# Altium PCB smart-water-sensor.PcbDoc (part 2 of 5)
Units mm, origin at the board's own origin, x right, y up, seen from the top; angles counter-clockwise.
Board outline 124.33 x 108.9 mm, 4 copper layers (Top Layer, Layer 1, Layer 2, Bottom Layer), stack 0.603 mm thick; 150 components, 74 nets, 469 pads, 463 vias.
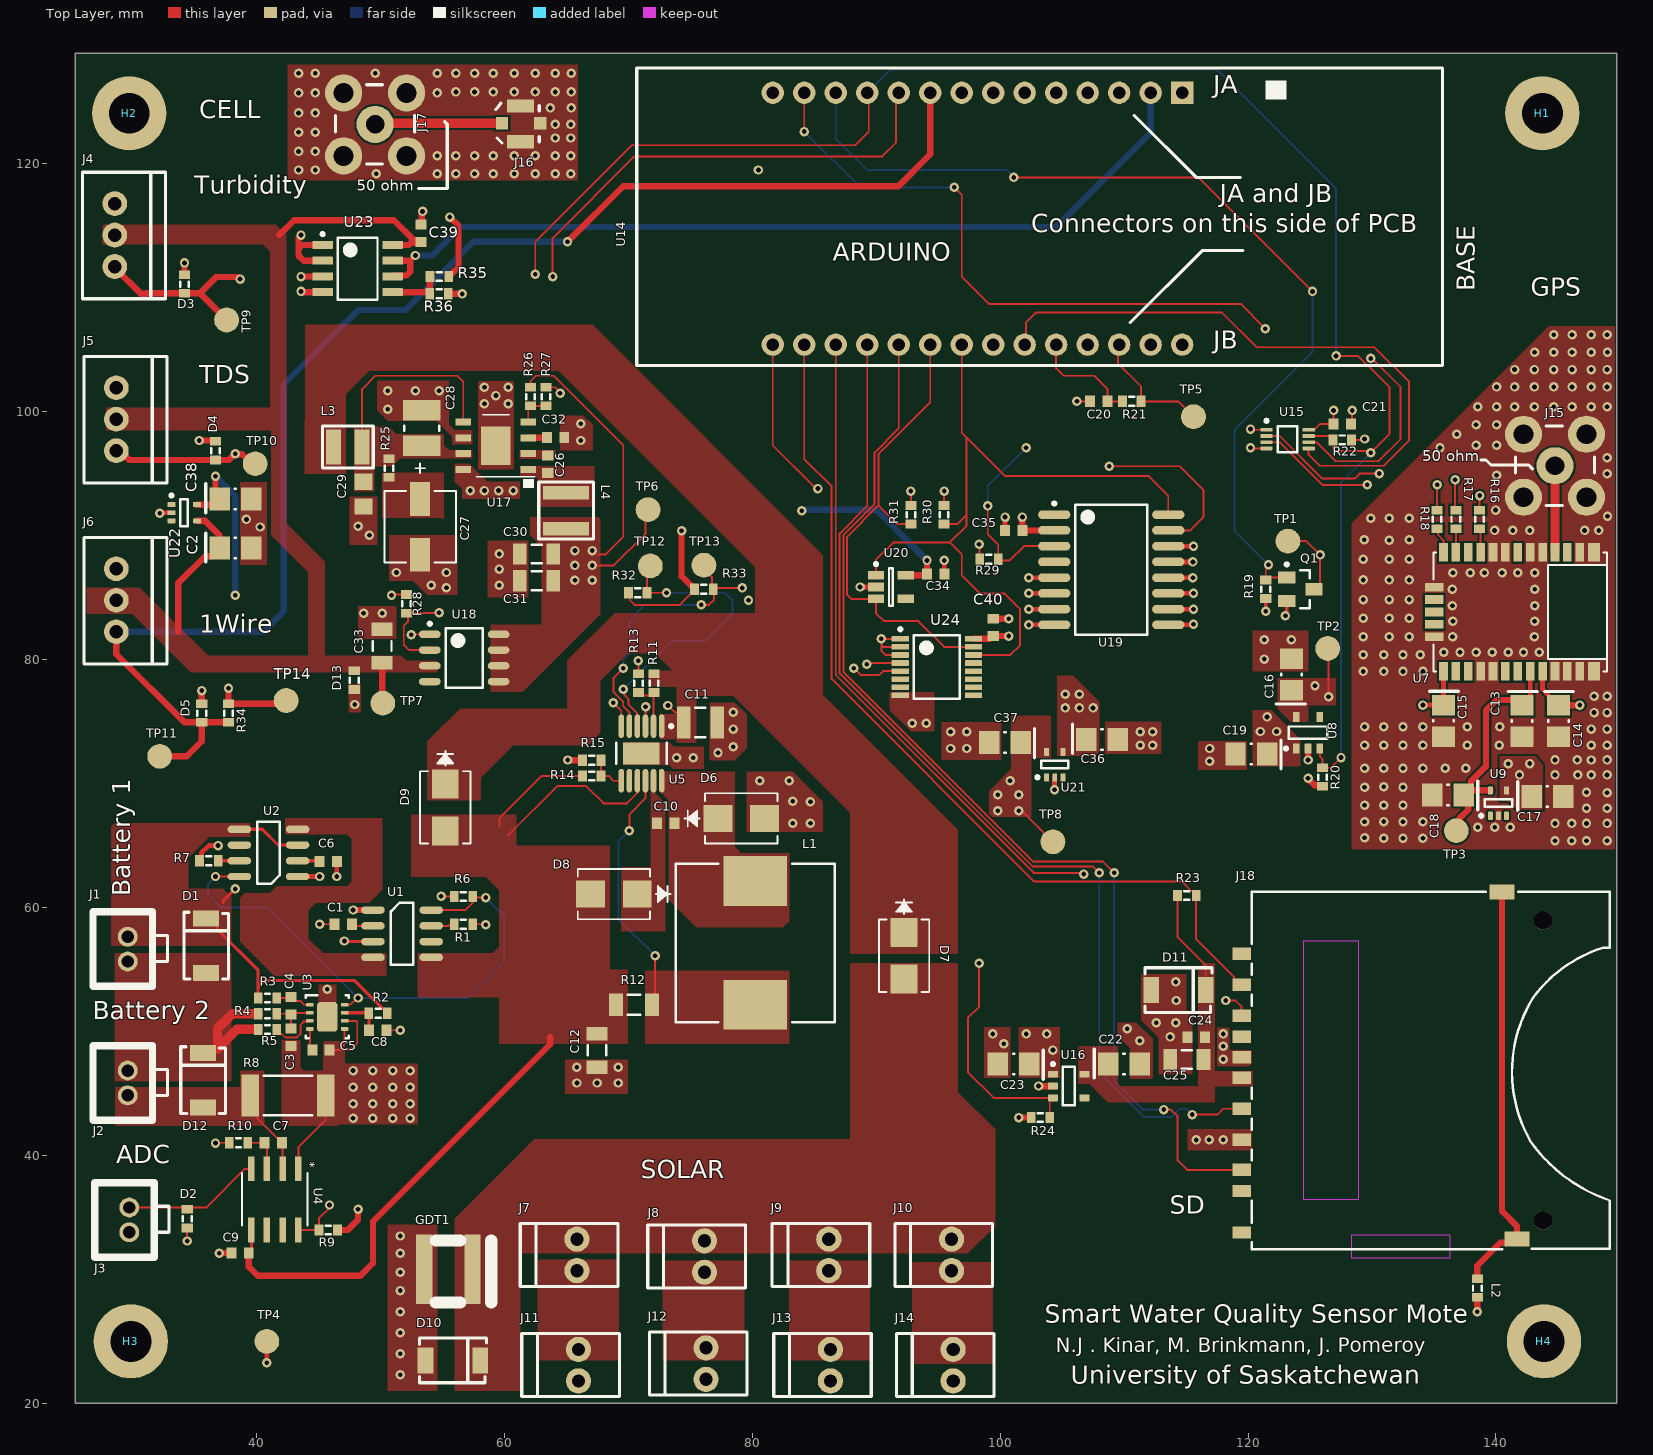
[diagram p0: Top Layer view]

## Part data (continued)
C27: library part 25SVPF27MX, "No Description Available", Capacitance=27uF, Case/Package=Radial, ESR (Equivalent Series Resistance)=40mR, Leakage Current=135uA, Manufacturer=Panasonic, Max Operating Temperature=105°C, Min Operating Temperature=-55°C, Package Quantity=1500, Ripple Current=2.45A, Supplier Part Number 1=P16511CT-ND, Tolerance=20%, Voltage=25V, Built_By=EMA_UL_Team, ComponentLink1Description=https://datasheet.ciiva.com/24094/svpf-os-262415-24094277.pdf?src-supplier=Mouser, ComponentLink1URL=https://datasheet.ciiva.com/24094/svpf-os-262415-24094277.pdf?src-supplier=Mouser, ComponentLink2Description=https://datasheet.ciiva.com/49031/70324301-49031162.pdf?src-supplier=Allied+Electronics, ComponentLink2URL=https://datasheet.ciiva.com/49031/70324301-49031162.pdf?src-supplier=Allied+Electronics, ComponentLink3Description=https://datasheet.ciiva.com/25746/1734360-25746540.pdf?src-supplier=Farnell, ComponentLink3URL=https://datasheet.ciiva.com/25746/1734360-25746540.pdf?src-supplier=Farnell, ComponentLink4Description=https://datasheet.ciiva.com/22746/1734360-22746216.pdf?src-supplier=Element14, ComponentLink4URL=https://datasheet.ciiva.com/22746/1734360-22746216.pdf?src-supplier=Element14, Copyright="Copyright (C) 2018 Accelerated Designs. All rights reserved", Diameter=5mm, Dissipation Factor=12%, Height=5.9mm, Height - Seated (Max)=0.236inch, Length=5.9mm, Life (Hours)=5000Hour, Manufacturer_Part_Number=25SVPF27MX, Manufacturer Part Number=25SVPF27MX, Mount="Surface Mount", Number of Pins=6, Packaging="Tape and Reel", Polarity=Polar, Pricing 1="1 = 1.02000, 10 = 0.80900, 100 = 0.60650, 500 = 0.45826 (USD)", REACH SVHC="No SVHC", RefDes=RefDes, Ripple Current (AC)=2.45A, RoHS=Yes, Stock 1=3478, Supplier 1=Digi-Key, Termination=SMD/SMT, Type=DEV, Vendor=Panasonic, Voltage Rating=25V, Voltage Rating (DC)=25V
C29: "Capacitor (Semiconductor SIM Model)", Capacitance=4.7uF, Case/Package=0805, Case Code (Metric)=2012, Dielectric=X5R, Dielectric Material=Ceramic, Manufacturer=TDK, Manufacturer Part Number=C2012X5R1H475K125AB, Max Operating Temperature=85°C, Min Operating Temperature=-55°C, Package Quantity=1, Supplier Part Number 1=445-5980-1-ND, Tolerance=10%, Voltage=50V, Case Code (Imperial)=0805, ComponentLink1Description=https://datasheet.ciiva.com/24216/c2012x5r1h475k125ab-265006-24216434.pdf?src-supplier=Mouser, ComponentLink1URL=https://datasheet.ciiva.com/24216/c2012x5r1h475k125ab-265006-24216434.pdf?src-supplier=Mouser, ComponentLink2Description=https://datasheet.ciiva.com/28673/mlcc-commercial-general-en-28673541.pdf?src-supplier=Element14, ComponentLink2URL=https://datasheet.ciiva.com/28673/mlcc-commercial-general-en-28673541.pdf?src-supplier=Element14, ComponentLink3Description=https://datasheet.ciiva.com/17487/e412-c-17487414.pdf?src-supplier=Avnet+Europe, ComponentLink3URL=https://datasheet.ciiva.com/17487/e412-c-17487414.pdf?src-supplier=Avnet+Europe, ComponentLink4Description=https://datasheet.ciiva.com/22725/1913358-22725564.pdf?src-supplier=Element14, ComponentLink4URL=https://datasheet.ciiva.com/22725/1913358-22725564.pdf?src-supplier=Element14, ComponentLink5Description=https://datasheet.ciiva.com/6276/tdkmlcccaprange-6276526.pdf?src-supplier=Digi-Key, ComponentLink5URL=https://datasheet.ciiva.com/6276/tdkmlcccaprange-6276526.pdf?src-supplier=Digi-Key, ComponentLink6Description=https://datasheet.ciiva.com/48671/e412-c-48671374.pdf?src-supplier=Avnet, ComponentLink6URL=https://datasheet.ciiva.com/48671/e412-c-48671374.pdf?src-supplier=Avnet, Composition=Ceramic, Depth=1.25mm, Height=1.25mm, LatestRevisionDate=29-May-2009, LatestRevisionNote="IPC-7351 Footprint Added.", Lead Free="Lead Free", Length=2mm, Mount="Surface Mount", PackageDescription="Chip Capacitor", PackageReference=C1206, Packaging="Tape and Reel", Pricing 1="1 = 0.80000, 10 = 0.56600, 100 = 0.37260, 500 = 0.27600, 1000 = 0.23460 (USD)", Published=8-Jun-2000, Publisher="Altium Limited", Radiation Hardening=No, REACH SVHC="No SVHC", RoHS=Yes, Stock 1=412452, Supplier 1=Digi-Key, Termination=SMD/SMT, Thickness=0.057inch, Voltage Rating=50V, Voltage Rating (DC)=50V, Weight=0.000194oz, Width=0.049inch
C30 C31 C33: "Capacitor (Semiconductor SIM Model)", Capacitance=47uF, Case/Package=1206, Case Code (Metric)=3216, Dielectric=X5R, Manufacturer=Murata, Manufacturer Part Number=GRM31CR61A476KE15L, Max Operating Temperature=85°C, Min Operating Temperature=-55°C, Package Quantity=2000, Supplier Part Number 1=490-9673-1-ND, Tolerance=10%, Voltage=10V, Case Code (Imperial)=1206, ComponentLink1Description=https://datasheet.ciiva.com/29536/grm31cr61a476ke15-01-29536840.pdf?src-supplier=Digi-Key, ComponentLink1URL=https://datasheet.ciiva.com/29536/grm31cr61a476ke15-01-29536840.pdf?src-supplier=Digi-Key, ComponentLink2Description=https://datasheet.ciiva.com/13337/product-13337807.pdf?src-supplier=Mouser, ComponentLink2URL=https://datasheet.ciiva.com/13337/product-13337807.pdf?src-supplier=Mouser, ComponentLink3Description=https://datasheet.ciiva.com/46445/1769893-46445005.pdf?src-supplier=Element14, ComponentLink3URL=https://datasheet.ciiva.com/46445/1769893-46445005.pdf?src-supplier=Element14, ComponentLink4Description=https://datasheet.ciiva.com/41860/partnumbering-e-01-41860758.pdf?src-supplier=Digi-Key, ComponentLink4URL=https://datasheet.ciiva.com/41860/partnumbering-e-01-41860758.pdf?src-supplier=Digi-Key, ComponentLink5Description=https://datasheet.ciiva.com/46445/1769893-46445004.pdf?src-supplier=Element14, ComponentLink5URL=https://datasheet.ciiva.com/46445/1769893-46445004.pdf?src-supplier=Element14, Depth=1.6mm, Height=1.6mm, LatestRevisionDate=29-May-2009, LatestRevisionNote="IPC-7351 Footprint Added.", Lead Free="Lead Free", Length=3.2mm, Material=Ceramic, Mount="Surface Mount", PackageDescription="Chip Capacitor", PackageReference=C1206, Packaging="Tape and Reel", Pricing 1="1 = 0.84000, 10 = 0.63700, 100 = 0.45540, 500 = 0.35254, 1000 = 0.30357 (USD)", Published=8-Jun-2000, Publisher="Altium Limited", REACH SVHC="No SVHC", RoHS=Yes, Stock 1=199340, Supplier 1=Digi-Key, Termination=SMD/SMT, Thickness=0.071inch, Voltage Rating=10V, Voltage Rating (DC)=10V, Width=1.6mm
C32: "Capacitor (Semiconductor SIM Model)", Capacitance=2.2uF, Case/Package=0603, Dielectric=X5R, Dielectric Material=Ceramic, Manufacturer=KEMET, Manufacturer Part Number=C0603C225K8PACTU, Max Operating Temperature=85°C, Min Operating Temperature=-55°C, Supplier Part Number 1=399-4911-1-ND, Tolerance=10%, Voltage=10V, ComponentLink1Description=https://datasheet.ciiva.com/11786/0900766b8116eb59-11786922.pdf?src-supplier=RSComponents, ComponentLink1URL=https://datasheet.ciiva.com/11786/0900766b8116eb59-11786922.pdf?src-supplier=RSComponents, ComponentLink2Description=https://datasheet.ciiva.com/18192/getdatasheetpartid-104076-18192933.pdf?src-supplier=Verical, ComponentLink2URL=https://datasheet.ciiva.com/18192/getdatasheetpartid-104076-18192933.pdf?src-supplier=Verical, ComponentLink3Description=https://datasheet.ciiva.com/7824/40889-7824025.pdf?src-supplier=Element14, ComponentLink3URL=https://datasheet.ciiva.com/7824/40889-7824025.pdf?src-supplier=Element14, ComponentLink4Description=https://datasheet.ciiva.com/26847/getdatasheetpartid-316295-26847626.pdf?src-supplier=Verical, ComponentLink4URL=https://datasheet.ciiva.com/26847/getdatasheetpartid-316295-26847626.pdf?src-supplier=Verical, Depth=0.8mm, Height=0.8mm, LatestRevisionDate=29-May-2009, LatestRevisionNote="IPC-7351 Footprint Added.", Lead Free="Lead Free", Length=1.6mm, Mount="Surface Mount", Number of Pins=2, PackageDescription="Chip Capacitor", PackageReference=C1206, Packaging="Tape and Reel", Pricing 1="1 = 0.24000, 10 = 0.16200, 100 = 0.08220, 500 = 0.05622, 1000 = 0.04973 (USD)", Published=8-Jun-2000, Publisher="Altium Limited", Radiation Hardening=No, RoHS=Yes, Stock 1=110745, Supplier 1=Digi-Key, Termination=SMD/SMT, Voltage Rating (DC)=10V
D1 D12: "Default Diode", Breakdown Voltage=100V, Case/Package=SMB, Clamping Voltage=146V, Leakage Current=5uA, Manufacturer=Bourns, Manufacturer Part Number=SMBJ9.0A, Max Operating Temperature=150°C, Max Power Dissipation=600W, Max Reverse Leakage Current=10uA, Max Surge Current=100A, Min Operating Temperature=-55°C, Operating Supply Voltage=3.5V, Package Quantity=3000, Peak Pulse Current=4.1A, Power Line Protection=No, Reverse Standoff Voltage=90V, Supplier Part Number 1=SMBJ9.0ABCT-ND, Test Current=1mA, ComponentLink1Description=http://www.bourns.com/data/global/pdfs/SMBJ.pdf, ComponentLink1URL=http://www.bourns.com/data/global/pdfs/SMBJ.pdf, ComponentLink2Description=https://datasheet.ciiva.com/25624/0900766b810f4eeb-25624683.pdf?src-supplier=RSComponents, ComponentLink2URL=https://datasheet.ciiva.com/25624/0900766b810f4eeb-25624683.pdf?src-supplier=RSComponents, ComponentLink3Description=https://datasheet.ciiva.com/15143/getdatasheetpartid-158332-15143823.pdf?src-supplier=Verical, ComponentLink3URL=https://datasheet.ciiva.com/15143/getdatasheetpartid-158332-15143823.pdf?src-supplier=Verical, ComponentLink4Description=https://datasheet.ciiva.com/331/littelfuse-tvs-diode-smbj-datasheet-pdf-331232.pdf?src-supplier=Digi-Key, ComponentLink4URL=https://datasheet.ciiva.com/331/littelfuse-tvs-diode-smbj-datasheet-pdf-331232.pdf?src-supplier=Digi-Key, ComponentLink5Description=https://datasheet.ciiva.com/8062/littelfuse-tvs-diode-smbj-8062311.pdf?src-supplier=Element14, ComponentLink5URL=https://datasheet.ciiva.com/8062/littelfuse-tvs-diode-smbj-8062311.pdf?src-supplier=Element14, ComponentLink6Description=https://datasheet.ciiva.com/331/littelfuse-tvs-diode-smbj-datasheet-pdf-331230.pdf?src-supplier=Digi-Key, ComponentLink6URL=https://datasheet.ciiva.com/331/littelfuse-tvs-diode-smbj-datasheet-pdf-331230.pdf?src-supplier=Digi-Key, ComponentLink7Description=https://datasheet.ciiva.com/331/littelfuse-tvs-diode-smbj-datasheet-pdf-331231.pdf?src-supplier=Digi-Key, ComponentLink7URL=https://datasheet.ciiva.com/331/littelfuse-tvs-diode-smbj-datasheet-pdf-331231.pdf?src-supplier=Digi-Key, ComponentLink8Description=https://datasheet.ciiva.com/16354/littelfuse-tvs-diode-smbj-16354943.pdf?src-supplier=Future+Electronics, ComponentLink8URL=https://datasheet.ciiva.com/16354/littelfuse-tvs-diode-smbj-16354943.pdf?src-supplier=Future+Electronics, ComponentLink9Description=https://datasheet.ciiva.com/26787/smbj90a-26787787.pdf?src-supplier=IIIC, ComponentLink9URL=https://datasheet.ciiva.com/26787/smbj90a-26787787.pdf?src-supplier=IIIC, ComponentLink10Description=https://datasheet.ciiva.com/17413/smbj-17413495.pdf?src-supplier=Avnet+Europe, ComponentLink10URL=https://datasheet.ciiva.com/17413/smbj-17413495.pdf?src-supplier=Avnet+Europe, ComponentLink11Description=https://datasheet.ciiva.com/334/smbj-334092.pdf?src-supplier=Digi-Key, ComponentLink11URL=https://datasheet.ciiva.com/334/smbj-334092.pdf?src-supplier=Digi-Key, ComponentLink12Description=https://datasheet.ciiva.com/334/smbj-334188.pdf?src-supplier=Digi-Key, ComponentLink12URL=https://datasheet.ciiva.com/334/smbj-334188.pdf?src-supplier=Digi-Key, ComponentLink13Description=https://datasheet.ciiva.com/334/smbj-334093.pdf?src-supplier=Digi-Key, ComponentLink13URL=https://datasheet.ciiva.com/334/smbj-334093.pdf?src-supplier=Digi-Key, ComponentLink14Description=https://datasheet.ciiva.com/334/smbj-334189.pdf?src-supplier=Digi-Key, ComponentLink14URL=https://datasheet.ciiva.com/334/smbj-334189.pdf?src-supplier=Digi-Key, ComponentLink15Description=https://datasheet.ciiva.com/334/smbj-334094.pdf?src-supplier=Digi-Key, ComponentLink15URL=https://datasheet.ciiva.com/334/smbj-334094.pdf?src-supplier=Digi-Key, ComponentLink16Description=https://datasheet.ciiva.com/334/smbj-334190.pdf?src-supplier=Digi-Key, ComponentLink16URL=https://datasheet.ciiva.com/334/smbj-334190.pdf?src-supplier=Digi-Key, Composition=Zener, Direction=Unidirectional, Element Configuration=Single, Min Breakdown Voltage=100V, Mount="Surface Mount", Number of Channels=1, Number of Elements=1, Number of Pins=2, Number of Unidirectional Channels=1, Packaging="Tape and Reel", Peak Pulse Power=600W, Polarity=Unidirectional, Pricing 1="1 = 0.48000, 10 = 0.33800, 25 = 0.27800, 100 = 0.22230, 250 = 0.16168, 500 = 0.13136, 1000 = 0.10104 (USD)", Radiation Hardening=No, Reverse Breakdown Voltage=100V, RoHS=Yes, Stock 1=26139, Supplier 1=Digi-Key, Termination=SMD/SMT
D2 D3 D4 D5 D13: "Default Diode", Case/Package=0603, Case Code (Metric)=1608, Clamping Voltage=45V, Manufacturer=Littelfuse, Manufacturer Part Number=RF1256-000, Max Operating Temperature=125°C, Min Operating Temperature=-55°C, Power Line Protection=No, Reverse Standoff Voltage=24V, Supplier Part Number 1=PESD0603-240CT-ND, Case Code (Imperial)=0603, Code_JEDEC=DO-214-AB, ComponentLink1Description=http://www.littelfuse.com/~/media/electronics/datasheets/polymer_esd_suppressors/littelfuse_polymer_esd_suppressor_pesd_catalog_datasheet.pdf.pdf?src-supplier=Digi-Key, ComponentLink1URL=http://www.littelfuse.com/~/media/electronics/datasheets/polymer_esd_suppressors/littelfuse_polymer_esd_suppressor_pesd_catalog_datasheet.pdf.pdf?src-supplier=Digi-Key, Composition=Zener, LatestRevisionDate=17-Jul-2002, LatestRevisionNote="Re-released for DXP Platform.", Mount="Surface Mount", Number of Bidirectional Channels=1, PackageDescription="DO-214-AB/SMC; 2 C-Bend Leads; Body 7.9 x 5.9 mm, inc. leads (LxW)", PackageReference=SMC, PackageVersion=Sep-1996, Packaging="Tape and Reel", Pricing 1="1 = 0.58000, 10 = 0.45300, 25 = 0.38200, 100 = 0.31080, 250 = 0.25752, 500 = 0.21312, 1000 = 0.15984, 2500 = 0.14652 (USD)", Published=8-Jun-2000, Publisher="Altium Limited", RoHS=Yes, Stock 1=74186, Supplier 1=Digi-Key
D6 D7 D8 D9: Average Rectified Current=4A, Case/Package=SMB, Forward Voltage=450mV, Manufacturer="Vishay Semiconductors", Max Forward Surge Current (Ifsm)=100A, Max Operating Temperature=150°C, Max Repetitive Reverse Voltage (Vrrm)=30V, Max Reverse Leakage Current=600uA, Min Operating Temperature=-65°C, Package Quantity=1, Supplier Part Number 1=SSB43L-E3/52TGICT-ND, ComponentLink1Description=https://datasheet.ciiva.com/7962/64541-7962449.pdf?src-supplier=Element14, ComponentLink1URL=https://datasheet.ciiva.com/7962/64541-7962449.pdf?src-supplier=Element14, ComponentLink2Description=https://datasheet.ciiva.com/14634/0900766b80dd0508-14634162.pdf?src-supplier=Allied+Electronics, ComponentLink2URL=https://datasheet.ciiva.com/14634/0900766b80dd0508-14634162.pdf?src-supplier=Allied+Electronics, ComponentLink3Description=https://datasheet.ciiva.com/4245/ssb43l-4245635.pdf?src-supplier=Arrow, ComponentLink3URL=https://datasheet.ciiva.com/4245/ssb43l-4245635.pdf?src-supplier=Arrow, ComponentLink4Description=https://datasheet.ciiva.com/15224/getdatasheetpartid-99263-15224680.pdf?src-supplier=Verical, ComponentLink4URL=https://datasheet.ciiva.com/15224/getdatasheetpartid-99263-15224680.pdf?src-supplier=Verical, ComponentLink5Description=https://datasheet.ciiva.com/18434/70217334-18434422.pdf?src-supplier=Allied+Electronics, ComponentLink5URL=https://datasheet.ciiva.com/18434/70217334-18434422.pdf?src-supplier=Allied+Electronics, Contact Plating=Tin, Current Rating=4A, Element Configuration=Single, Forward Current=4A, Height=0.095inch, Lead Free="Lead Free", Length=4.7mm, Manufacturer Part Number=SSB43L-E3/52T, Max Reverse Voltage (DC)=30V, Max Surge Current=100A, Mount="Surface Mount", Number of Pins=2, Output Current=4A, Packaging="Tape and Reel", Peak Non-Repetitive Surge Current=100A, Peak Reverse Current=600uA, Polarity=Standard, Pricing 1="1 = 0.58000, 10 = 0.49300, 100 = 0.36800 (USD)", Radiation Hardening=No, REACH SVHC=Unknown, RoHS=Yes, Stock 1=195068, Supplier 1=Digi-Key, Voltage Rating (DC)=30V, Width=3.8mm
D10: "Default Diode", Breakdown Voltage=20V, Case/Package=SMB, Clamping Voltage=29.2V, Leakage Current=1uA, Manufacturer=Littelfuse, Manufacturer Part Number=SMBJ18A, Max Breakdown Voltage=22.1V, Max Operating Temperature=150°C, Max Power Dissipation=5W, Max Surge Current=20.6A, Min Operating Temperature=-65°C, Operating Supply Voltage=18V, Package Quantity=3000, Peak Pulse Power=600W, Power Line Protection=No, Supplier Part Number 1=SMBJ18ALFCT-ND, Test Current=1mA, ComponentLink1Description=http://www.bourns.com/data/global/pdfs/SMBJ.pdf, ComponentLink1URL=http://www.bourns.com/data/global/pdfs/SMBJ.pdf, ComponentLink2Description=https://datasheet.ciiva.com/25624/0900766b810f4eeb-25624683.pdf?src-supplier=RSComponents, ComponentLink2URL=https://datasheet.ciiva.com/25624/0900766b810f4eeb-25624683.pdf?src-supplier=RSComponents, ComponentLink3Description=https://datasheet.ciiva.com/15143/getdatasheetpartid-158332-15143823.pdf?src-supplier=Verical, ComponentLink3URL=https://datasheet.ciiva.com/15143/getdatasheetpartid-158332-15143823.pdf?src-supplier=Verical, ComponentLink4Description=https://datasheet.ciiva.com/331/littelfuse-tvs-diode-smbj-datasheet-pdf-331232.pdf?src-supplier=Digi-Key, ComponentLink4URL=https://datasheet.ciiva.com/331/littelfuse-tvs-diode-smbj-datasheet-pdf-331232.pdf?src-supplier=Digi-Key, ComponentLink5Description=https://datasheet.ciiva.com/8062/littelfuse-tvs-diode-smbj-8062311.pdf?src-supplier=Element14, ComponentLink5URL=https://datasheet.ciiva.com/8062/littelfuse-tvs-diode-smbj-8062311.pdf?src-supplier=Element14, ComponentLink6Description=https://datasheet.ciiva.com/331/littelfuse-tvs-diode-smbj-datasheet-pdf-331230.pdf?src-supplier=Digi-Key, ComponentLink6URL=https://datasheet.ciiva.com/331/littelfuse-tvs-diode-smbj-datasheet-pdf-331230.pdf?src-supplier=Digi-Key, ComponentLink7Description=https://datasheet.ciiva.com/331/littelfuse-tvs-diode-smbj-datasheet-pdf-331231.pdf?src-supplier=Digi-Key, ComponentLink7URL=https://datasheet.ciiva.com/331/littelfuse-tvs-diode-smbj-datasheet-pdf-331231.pdf?src-supplier=Digi-Key, ComponentLink8Description=https://datasheet.ciiva.com/16354/littelfuse-tvs-diode-smbj-16354943.pdf?src-supplier=Future+Electronics, ComponentLink8URL=https://datasheet.ciiva.com/16354/littelfuse-tvs-diode-smbj-16354943.pdf?src-supplier=Future+Electronics, Composition=Zener, Direction=Unidirectional, Element Configuration=Single, Height=2.237mm, Lead Free="Lead Free", Length=4.57mm, Max Reverse Leakage Current=1uA, Min Breakdown Voltage=20V, Mount="Surface Mount", Number of Channels=1, Number of Elements=1, Number of Pins=2, Number of Unidirectional Channels=1, Packaging="Tape and Reel", Peak Pulse Current=20.6A, Polarity=Unidirectional, Power Dissipation=600W, Pricing 1="1 = 0.53000, 10 = 0.41600, 25 = 0.35080, 100 = 0.28550, 250 = 0.23660, 500 = 0.19580, 1000 = 0.14685 (USD)", Radiation Hardening=No, REACH SVHC=Unknown, Reverse Breakdown Voltage=20V, Reverse Standoff Voltage=18V, RoHS=Yes, Stock 1=15394, Supplier 1=Digi-Key, Termination=SMD/SMT, Voltage Rating (DC)=18V, Width=3.94mm
D11: "Default Diode", Breakdown Voltage=6.4V, Case/Package=SMB, Clamping Voltage=9.2V, Current=68A, Leakage Current=800uA, Manufacturer=Littelfuse, Manufacturer Part Number=SMBJ5.0A, Max Breakdown Voltage=7V, Max Operating Temperature=150°C, Max Power Dissipation=600W, Max Surge Current=65.3A, Min Operating Temperature=-55°C, Operating Supply Voltage=5V, Package Quantity=3000, Power Line Protection=No, Supplier Part Number 1=SMBJ5.0ALFCT-ND, Test Current=10mA, ComponentLink1Description=http://www.bourns.com/docs/Product-Datasheets/SMBJ.pdf, ComponentLink1URL=http://www.bourns.com/docs/Product-Datasheets/SMBJ.pdf, ComponentLink2Description=https://datasheet.ciiva.com/17412/ds19002-17412873.pdf, ComponentLink2URL=https://datasheet.ciiva.com/17412/ds19002-17412873.pdf, ComponentLink3Description=https://datasheet.ciiva.com/16427/ds19002-16427518.pdf, ComponentLink3URL=https://datasheet.ciiva.com/16427/ds19002-16427518.pdf, ComponentLink4Description=https://datasheet.ciiva.com/18403/70184815-18403605.pdf, ComponentLink4URL=https://datasheet.ciiva.com/18403/70184815-18403605.pdf, ComponentLink5Description=https://datasheet.ciiva.com/15143/getdatasheetpartid-117005-15143558.pdf, ComponentLink5URL=https://datasheet.ciiva.com/15143/getdatasheetpartid-117005-15143558.pdf, ComponentLink6Description=https://datasheet.ciiva.com/46381/1677318-46381958.pdf, ComponentLink6URL=https://datasheet.ciiva.com/46381/1677318-46381958.pdf, ComponentLink7Description=https://datasheet.ciiva.com/25624/0900766b810f4eeb-25624712.pdf, ComponentLink7URL=https://datasheet.ciiva.com/25624/0900766b810f4eeb-25624712.pdf, ComponentLink8Description=https://datasheet.ciiva.com/331/littelfuse-tvs-diode-smbj-datasheet-pdf-331131.pdf, ComponentLink8URL=https://datasheet.ciiva.com/331/littelfuse-tvs-diode-smbj-datasheet-pdf-331131.pdf, ComponentLink9Description=https://datasheet.ciiva.com/34302/1546929-34302459.pdf, ComponentLink9URL=https://datasheet.ciiva.com/34302/1546929-34302459.pdf, ComponentLink10Description=https://datasheet.ciiva.com/331/littelfuse-tvs-diode-smbj-datasheet-pdf-331132.pdf, ComponentLink10URL=https://datasheet.ciiva.com/331/littelfuse-tvs-diode-smbj-datasheet-pdf-331132.pdf, ComponentLink11Description=https://datasheet.ciiva.com/4508/littelfuse-tvs-diode-smbj-48653-4508124.pdf, ComponentLink11URL=https://datasheet.ciiva.com/4508/littelfuse-tvs-diode-smbj-48653-4508124.pdf, ComponentLink12Description=https://datasheet.ciiva.com/331/littelfuse-tvs-diode-smbj-datasheet-pdf-331133.pdf, ComponentLink12URL=https://datasheet.ciiva.com/331/littelfuse-tvs-diode-smbj-datasheet-pdf-331133.pdf, Direction=Unidirectional, Element Configuration=Single, ESD Protection=Yes, Height=2.44mm, Lead Free="Lead Free", Length=4.57mm, Max Reverse Leakage Current=800uA, Min Breakdown Voltage=6.4V, Mount="Surface Mount", Number of Channels=1, Number of Elements=1, Number of Pins=2, Number of Unidirectional Channels=1, Packaging="Tape and Reel", Peak Pulse Current=65.3A, Peak Pulse Power=600W, Polarity=Unidirectional, Power Dissipation=600W, Pricing 1="1=0.42, 10=0.327, 25=0.2756, 100=0.2244, 250=0.18588, 500=0.15384, 1000=0.11538 (USD)", Radiation Hardening=No, REACH SVHC=Unknown, Reverse Breakdown Voltage=6.4V, Reverse Standoff Voltage=5V, Stock 1=37178, Supplier 1=Digi-Key, Termination=SMD/SMT, Voltage=5V, Voltage Rating (DC)=5V, Width=3.94mm
GDT1: "Gas discharge tube", Current - AC Discharge (Nom)=-, Impulse Discharge Current (8/20µs)="150A (10/700µs)", Manufacturer="Bourns Inc.", Manufacturer Part Number=2031-23T-SM-RPLF, Package / Case="2-SMD Cylinder Square End", Supplier Part Number 1=2031-23T-SM-RPLFCT-ND, Voltage - DC Spark Over (Nom)=185V, Category="Circuit Protection", ComponentLink1Description=http://www.bourns.com/data/global/pdfs/2031-xxT.pdf, ComponentLink1URL=http://www.bourns.com/data/global/pdfs/2031-xxT.pdf, Fail Short=No, Mounting Type="Surface Mount", Number of Poles=2, Packaging="Cut Tape (CT)", Pricing 1="1=1.44, 10=1.307, 25=1.2644, 50=1.0836, 100=0.903, 250=0.8772, 500=0.7439 (USD)", RoHS="RoHS Compliant", Stock 1=847, Supplier 1=Digi-Key, Tolerance=-
H1 H2 H3 H4: library part "Mouting hole", "Mounting Hole"
J1 J2 J3: Color=Natural, Contact Resistance=20mR, Current Rating=2A, Housing Color=White, Insulation Resistance=1MR, Manufacturer=JST, Manufacturer Part Number=B2B-PH-K-S(LF)(SN), Max Operating Temperature=85°C, Max Voltage Rating (AC)=100V, Min Operating Temperature=-25°C, Supplier Part Number 1=455-1704-ND, ComponentLink1Description=https://datasheet.ciiva.com/6747/80560-6747392.pdf?src-supplier=Newark, ComponentLink1URL=https://datasheet.ciiva.com/6747/80560-6747392.pdf?src-supplier=Newark, ComponentLink2Description=https://datasheet.ciiva.com/11746/0900766b8082f551-11746676.pdf?src-supplier=RSComponents, ComponentLink2URL=https://datasheet.ciiva.com/11746/0900766b8082f551-11746676.pdf?src-supplier=RSComponents, ComponentLink3Description=https://datasheet.ciiva.com/8052/80560-8052022.pdf?src-supplier=Element14, ComponentLink3URL=https://datasheet.ciiva.com/8052/80560-8052022.pdf?src-supplier=Element14, ComponentLink4Description=https://datasheet.ciiva.com/712/eph-712442.pdf?src-supplier=Digi-Key, ComponentLink4URL=https://datasheet.ciiva.com/712/eph-712442.pdf?src-supplier=Digi-Key, ComponentLink5Description=https://datasheet.ciiva.com/16422/b2b-ph-k-slfsn-16422715.pdf?src-supplier=Future+Electronics, ComponentLink5URL=https://datasheet.ciiva.com/16422/b2b-ph-k-slfsn-16422715.pdf?src-supplier=Future+Electronics, Connector Type="Male Pin", Contact Material=Brass, Contact Mating Length=0.13inch, Contact Plating=Tin, Depth=4.5mm, Fastening Type=Detent, Gender=Male, Height=9.4mm, Housing Material=Polyamide, Lead Free="Lead Free", Lead Pitch=2mm, Length=5.9mm, Max Current Rating=2A, Max Voltage Rating (DC)=100V, Mount="Through Hole", Number of Contacts=2, Number of Pins=2, Number of Poles=2, Number of Positions=2, Number of Rows=1, Orientation=Straight, Packaging=Bulk, Pitch=2mm, Pricing 1="1 = 0.17000, 10 = 0.16200, 100 = 0.10020, 500 = 0.08288, 1000 = 0.07252, 5000 = 0.06216, 10000 = 0.06044 (USD)", REACH SVHC="No SVHC", RoHS=Yes, Stock 1=287924, Supplier 1=Digi-Key, Termination=Solder, Voltage Rating=100V, Voltage Rating (AC)=100V, Width=4.5mm, Working Voltage=100V
J4 J5 J6: Color=Black, Contact Resistance=30mR, Current Rating=3A, Flammability Rating="UL94 V-0", Manufacturer=Molex, Manufacturer Part Number=70543-0002, Max Operating Temperature=105°C, Max Voltage Rating (AC)=250V, Min Operating Temperature=-40°C, Package Quantity=2496, Supplier Part Number 1=WM4801-ND, Approvals=UL, ComponentLink1Description=https://datasheet.ciiva.com/11747/0900766b80d8d64b-11747399.pdf?src-supplier=RSComponents, ComponentLink1URL=https://datasheet.ciiva.com/11747/0900766b80d8d64b-11747399.pdf?src-supplier=RSComponents, ComponentLink2Description=https://datasheet.ciiva.com/30061/97290705430002-pcb-headers-30061900.pdf?src-supplier=Onlinecomponents.com, ComponentLink2URL=https://datasheet.ciiva.com/30061/97290705430002-pcb-headers-30061900.pdf?src-supplier=Onlinecomponents.com, ComponentLink3Description=https://datasheet.ciiva.com/19462/884643-19462365.pdf?src-supplier=Jameco, ComponentLink3URL=https://datasheet.ciiva.com/19462/884643-19462365.pdf?src-supplier=Jameco, ComponentLink4Description=https://datasheet.ciiva.com/5150/0705430002-pcb-headers-172733-5150622.pdf?src-supplier=Mouser, ComponentLink4URL=https://datasheet.ciiva.com/5150/0705430002-pcb-headers-172733-5150622.pdf?src-supplier=Mouser, ComponentLink5Description=https://datasheet.ciiva.com/16657/0705430002-pcb-headers-16657766.pdf?src-supplier=Avnet+Europe, ComponentLink5URL=https://datasheet.ciiva.com/16657/0705430002-pcb-headers-16657766.pdf?src-supplier=Avnet+Europe, Contact Material=Bronze, Contact Plating=Gold, Depth=6.6mm, ELV=Compliant, Gender=Male, Glow Wire Compliant=Non-compliant, Height=11.81mm, Housing Color=Black, Housing Material=Thermoplastic, Lead Free="Lead Free", Lead Pitch=2.54mm, Length=10.17mm, Material=Brass, Max Current Rating=3A, Mount="Through Hole", Number of Circuits=3, Number of Contacts=3, Number of Positions=3, Number of Rows=1, Orientation=Vertical, Packaging=Rail/Tube, Pitch=2.54mm, Pricing 1="1 = 0.92000, 10 = 0.80500, 100 = 0.69450, 500 = 0.56826, 2496 = 0.45776, 7488 = 0.44198, 12480 = 0.41041 (USD)", Radiation Hardening=No, REACH SVHC=Unknown, RoHS=Yes, Stock 1=32342, Supplier 1=Digi-Key, Termination=Solder, Voltage Rating=250V, Voltage Rating (DC)=250V
J7 J8 J9 J10 J11 J12 J13 J14: Color=White, Contact Resistance=10mR, Current Rating=4A, Flammability Rating="UL94 V-0", Insulation Resistance=500GR, Manufacturer=Molex, Manufacturer Part Number=22-23-2021, Max Operating Temperature=75°C, Min Operating Temperature=0°C, Package Quantity=3000, Supplier Part Number 1=WM4200-ND, Voltage Rating=250V, Approvals=UL, ComponentLink1Description=https://datasheet.ciiva.com/19454/232266-19454304.pdf?src-supplier=Jameco, ComponentLink1URL=https://datasheet.ciiva.com/19454/232266-19454304.pdf?src-supplier=Jameco, ComponentLink2Description=https://datasheet.ciiva.com/22683/1834442-22683561.pdf?src-supplier=Element14, ComponentLink2URL=https://datasheet.ciiva.com/22683/1834442-22683561.pdf?src-supplier=Element14, ComponentLink3Description=https://datasheet.ciiva.com/5150/0022232021-pcb-headers-227096-5150681.pdf?src-supplier=Mouser, ComponentLink3URL=https://datasheet.ciiva.com/5150/0022232021-pcb-headers-227096-5150681.pdf?src-supplier=Mouser, ComponentLink4Description=https://datasheet.ciiva.com/11746/0900766b80d8f4d1-11746058.pdf?src-supplier=RSComponents, ComponentLink4URL=https://datasheet.ciiva.com/11746/0900766b80d8f4d1-11746058.pdf?src-supplier=RSComponents, ComponentLink5Description=https://datasheet.ciiva.com/30253/114200022232021-pcb-headers-30253002.pdf?src-supplier=Onlinecomponents.com, ComponentLink5URL=https://datasheet.ciiva.com/30253/114200022232021-pcb-headers-30253002.pdf?src-supplier=Onlinecomponents.com, ComponentLink6Description=https://datasheet.ciiva.com/16658/0022232021-pcb-headers-16658167.pdf?src-supplier=Avnet+Europe, ComponentLink6URL=https://datasheet.ciiva.com/16658/0022232021-pcb-headers-16658167.pdf?src-supplier=Avnet+Europe, ComponentLink7Description=https://datasheet.ciiva.com/18453/70190606-18453638.pdf?src-supplier=Allied+Electronics, ComponentLink7URL=https://datasheet.ciiva.com/18453/70190606-18453638.pdf?src-supplier=Allied+Electronics, ComponentLink8Description=https://datasheet.ciiva.com/9468/0022232021-pcb-headers-9468476.pdf?src-supplier=Avnet, ComponentLink8URL=https://datasheet.ciiva.com/9468/0022232021-pcb-headers-9468476.pdf?src-supplier=Avnet, Contact Material=Brass, Contact Plating=Tin, Depth=6.35mm, Gender=Male, Glow Wire Compliant=Non-compliant, Halogen Free="Low Halogen", Height=10.67mm, Housing Color=White, Housing Material=Nylon, Lead Free="Lead Free", Length=5.08mm, Max Current Rating=4A, Mount="Through Hole", Number of Circuits=2, Number of Contacts=2, Number of Positions=2, Number of Rows=1, Orientation=Straight, Packaging=Bulk, Pitch=2.54mm, Pricing 1="1=0.17000, 10=0.16100, 100=0.11150, 500=0.09438, 1000=0.07722, 5000=0.06864, 10000=0.06221 (USD)", Radiation Hardening=No, REACH SVHC=Unknown, RoHS=Yes, Stock 1=76471, Supplier 1=Digi-Key, Termination="Through Hole", Voltage Rating (DC)=250V
J15 J17: Case/Package=SMA, Dielectric Material=PTFE, Frequency=3GHz, Insulation Resistance=5GR, Manufacturer="TE Connectivity", Max Operating Temperature=185°C, Min Operating Temperature=-67°C, Package Quantity=1, Supplier Part Number 1=A97594-ND, Body Material=Zinc, Body Plating=Gold, ComponentLink1Description=https://datasheet.ciiva.com/642/eng-cd-1814832-b1-642785.pdf?src-supplier=Digi-Key, ComponentLink1URL=https://datasheet.ciiva.com/642/eng-cd-1814832-b1-642785.pdf?src-supplier=Digi-Key, ComponentLink2Description=https://datasheet.ciiva.com/642/eng-cd-1814832-b1-642785.pdf?src-supplier=Avnet, ComponentLink2URL=https://datasheet.ciiva.com/642/eng-cd-1814832-b1-642785.pdf?src-supplier=Avnet, ComponentLink3Description=https://datasheet.ciiva.com/23783/1663582-23783560.pdf?src-supplier=Newark, ComponentLink3URL=https://datasheet.ciiva.com/23783/1663582-23783560.pdf?src-supplier=Newark, ComponentLink4Description=https://datasheet.ciiva.com/16318/5-1814832-1-16318587.pdf?src-supplier=Future+Electronics, ComponentLink4URL=https://datasheet.ciiva.com/16318/5-1814832-1-16318587.pdf?src-supplier=Future+Electronics, ComponentLink5Description=https://datasheet.ciiva.com/11762/0900766b80a70d0f-11762254.pdf?src-supplier=RSComponents, ComponentLink5URL=https://datasheet.ciiva.com/11762/0900766b80a70d0f-11762254.pdf?src-supplier=RSComponents, ComponentLink6Description=https://datasheet.ciiva.com/26824/getdatasheetpartid-396696-26824822.pdf?src-supplier=Verical, ComponentLink6URL=https://datasheet.ciiva.com/26824/getdatasheetpartid-396696-26824822.pdf?src-supplier=Verical, ComponentLink7Description=https://datasheet.ciiva.com/30201/eng-cd-1814832-a-30201302.pdf?src-supplier=Onlinecomponents.com, ComponentLink7URL=https://datasheet.ciiva.com/30201/eng-cd-1814832-a-30201302.pdf?src-supplier=Onlinecomponents.com, ComponentLink8Description=https://datasheet.ciiva.com/25908/eng-cd-1814832-a-25908583.pdf?src-supplier=Avnet+Europe, ComponentLink8URL=https://datasheet.ciiva.com/25908/eng-cd-1814832-a-25908583.pdf?src-supplier=Avnet+Europe, ComponentLink9Description=https://datasheet.ciiva.com/16469/eng-cd-1814832-a-16469256.pdf?src-supplier=Avnet+Asia, ComponentLink9URL=https://datasheet.ciiva.com/16469/eng-cd-1814832-a-16469256.pdf?src-supplier=Avnet+Asia, Connector System=Cable-to-Board, Connector Type=SMA, Contact Material=Bronze, Contact Plating=Gold, Depth=6.4mm, ELV=Compliant, Fastening Type=Threaded, Gender=Female, Impedance=50R, Insulation Material=Polytetrafluoroethylene, Lead Free="Lead Free", Length=0.532inch, Manufacturer Part Number=5-1814832-1, Max Frequency=3GHz, Mount="Through Hole", Number of Positions=1, Orientation=Straight, Packaging=Box, Plating=Nickel, Polarity=Normal, Pricing 1="1 = 1.99000, 10 = 1.80400, 25 = 1.69360, 50 = 1.62000, 100 = 1.54640, 250 = 1.39908, 500 = 1.28864, 1000 = 1.10454 (USD)", Radiation Hardening=No, REACH SVHC="No SVHC", RoHS=Yes, Sealable="No (Without)", Stock 1=34232, Supplier 1=Digi-Key, Tail Length=4mm, Termination="Through Hole", Wire/Cable Type=Coaxial
J16: Dielectric Material=Polymer, Frequency=6Hz, Insulation Resistance=500MR, Manufacturer="Amphenol RF", Max Frequency=6GHz, Max Operating Temperature=90°C, Min Operating Temperature=-40°C, Package Quantity=1, Supplier Part Number 1=ARF1579CT-ND, Body Material="Bronze,Liquid Crystal Polymer,Polymer", Body Plating=Silver, ComponentLink1Description=http://drawings.amphenolrf.com/Customer_Outline/CA-1JB.pdf, ComponentLink1URL=http://drawings.amphenolrf.com/Customer_Outline/CA-1JB.pdf, ComponentLink2Description=http://www.mouser.com/ds/2/18/CA-1JB-713210.pdf, ComponentLink2URL=http://www.mouser.com/ds/2/18/CA-1JB-713210.pdf, ComponentLink3Description=https://www.distrelec.biz/Web/Downloads/46/08/04614608.pdf?mime=application%2Fpdf, ComponentLink3URL=https://www.distrelec.biz/Web/Downloads/46/08/04614608.pdf?mime=application%2Fpdf, ComponentLink4Description=http://www.farnell.com/datasheets/689597.pdf, ComponentLink4URL=http://www.farnell.com/datasheets/689597.pdf, ComponentLink5Description=http://www.alliedelec.com/m/d/41feb3dea93af6045b471b16e58c5e32.pdf, ComponentLink5URL=http://www.alliedelec.com/m/d/41feb3dea93af6045b471b16e58c5e32.pdf, ComponentLink6Description=https://www.verical.com/server-webapp/html/getDatasheet?partID=168895, ComponentLink6URL=https://www.verical.com/server-webapp/html/getDatasheet?partID=168895, ComponentLink7Description=http://www.amphenolrf.com/media/downloads/2852/CA-1PAX113-XXXYZ.pdf, ComponentLink7URL=http://www.amphenolrf.com/media/downloads/2852/CA-1PAX113-XXXYZ.pdf, ComponentLink8Description=http://www.jameco.com/Jameco/Products/ProdDS/2036357.pdf, ComponentLink8URL=http://www.jameco.com/Jameco/Products/ProdDS/2036357.pdf, Connector Type="Coaxial,Male Pin", Contact Material=Brass, Contact Plating=Gold, Depth=3mm, Fastening Type=Snap, Height=1.244mm, Impedance=50R, Insulation Material=Polymer, Lead Free="Lead Free", Length=2.6mm, Manufacturer Part Number=A-1JB, Mating Cycles=30, Mount="Surface Mount", Orientation=Straight, Packaging="Tape and Reel", Plating="Liquid Crystal Polymer,Polymer", Polarity=Standard, Pricing 1="1 = 0.89000, 10 = 0.78500, 25 = 0.73920, 50 = 0.70840, 100 = 0.67760, 250 = 0.61600, 500 = 0.55440, 1000 = 0.49280 (USD)", Radiation Hardening=No, REACH SVHC=Unknown, RoHS=Yes, Stock 1=52082, Supplier 1=Digi-Key, Termination=Solder, Weight=0.001058oz
J18: library part 693061010911, "WR-CRD SD Card Connector, Push & Push, with Card Detection", Manufacturer="Wurth Electronics", Max Operating Temperature=85°C, Min Operating Temperature=-25°C, Operating Temperature="-25 to 85 degC", Package Quantity=1, Rated Current=0.5A, Supplier Part Number 1=732-3816-1-ND, Working Voltage="500V AC", ComponentLink1Description=Manufacturer, ComponentLink1URL=http://www.we-online.de, ComponentLink2Description=Datasheet, ComponentLink2URL=http://katalog.we-online.de/em/datasheet/693061010911.pdf, ComponentLink3Description=https://datasheet.ciiva.com/6935/693061010911-6935172.pdf, ComponentLink3URL=https://datasheet.ciiva.com/6935/693061010911-6935172.pdf, ComponentLink4Description=https://datasheet.ciiva.com/25605/0900766b81113f30-25605368.pdf, ComponentLink4URL=https://datasheet.ciiva.com/25605/0900766b81113f30-25605368.pdf, ComponentLink5Description=https://datasheet.ciiva.com/6935/693061010911-6935165.pdf, ComponentLink5URL=https://datasheet.ciiva.com/6935/693061010911-6935165.pdf, Connector Type=Connector,Socket, Contact Material="Copper,Gold,Copper Alloy", Contact Plating=Gold, Height=2.85mm, Lead Free="Lead Free", Length=28.8mm, Manufacturer Part Number=693061010911, Mount="Surface Mount", Mounting Technology=SMT, Number of Contacts=9, Packaging="Cut Tape", Part Number=693061010911, Pricing 1="1=5.01, 10=4.9, 50=4.312, 100=4.116, 200=3.528 (USD)", Published Date="Feb. 2018", Publisher="Wurth Elektronik", REACH SVHC=Unknown, Stock 1=1087, Supplier 1=Digi-Key, Termination=SMD/SMT, Width=28.9mm
L1: Case/Package=Nonstandard, Current Rating=3.2A, DC Resistance (DCR)=70mR, Frequency=8.5MHz, Inductance=39uH, Inductance Tolerance=20%, Manufacturer=Bourns, Manufacturer Part Number=SRR1280-390M, Max Operating Temperature=125°C, Min Operating Temperature=-40°C, Package Quantity=400, Resistance=70MR, Saturation Current=3.1A, Supplier Part Number 1=SRR1280-390MCT-ND, Test Frequency=2.52MHz, Code_IEC=1005, Code_JEITA=0402, ComponentLink1Description=https://datasheet.ciiva.com/1062/srr1280-1062601.pdf?src-supplier=Digi-Key, ComponentLink1URL=https://datasheet.ciiva.com/1062/srr1280-1062601.pdf?src-supplier=Digi-Key, ComponentLink2Description=https://datasheet.ciiva.com/1062/srr1280-1062602.pdf?src-supplier=Digi-Key, ComponentLink2URL=https://datasheet.ciiva.com/1062/srr1280-1062602.pdf?src-supplier=Digi-Key, ComponentLink3Description=https://datasheet.ciiva.com/48684/srr1280-48684942.pdf?src-supplier=Avnet, ComponentLink3URL=https://datasheet.ciiva.com/48684/srr1280-48684942.pdf?src-supplier=Avnet, Composition=Wirewound, Core Material=Ferrite, DC Current=3.2A, Depth=12.8mm, Height=7.5mm, Height - Seated (Max)=0.315inch, LatestRevisionDate=29-May-2009, LatestRevisionNote="IPC-7351 Footprint Added.", Length=12.5mm, Material=Steel, Max DC Current=3.2A, Military Standard=Not, Mount="Surface Mount", Number of Pins=2, PackageDescription="Chip Inductor", PackageReference=0402-A, Packaging="Tape and Reel", Pricing 1="1 = 1.25000, 10 = 1.15900, 100 = 0.83780 (USD)", Published=8-Jun-2000, Publisher="Altium Limited", Q Factor=24, REACH SVHC="No SVHC", RMS Current (Irms)=3.2A, RoHS=Yes, Self Resonant Frequency=8.5MHz, Shielding=Shielded, Stock 1=6267, Supplier 1=Digi-Key, Termination=SMD/SMT, Tolerance=20%, Width=12.5mm
L2: Current Rating (Max)=500mA, DC Resistance (DCR) (Max)="500 mOhm", Impedance @ Frequency="1.5 kOhm @ 100MHz", Manufacturer="Murata Electronics North America", Manufacturer Part Number=BLM18HE152SN1D, Operating Temperature="-55°C ~ 125°C", Package / Case="0603 (1608 Metric)", Ratings=-, Supplier Part Number 1=490-5216-1-ND, Category=Filters, Code_IEC=1005, Code_JEITA=0402, ComponentLink1Description=http://www.murata.com/en-us/products/productdata/8796741599262/ENFA0004.pdf, ComponentLink1URL=http://www.murata.com/en-us/products/productdata/8796741599262/ENFA0004.pdf, Filter Type="Signal Line", Height (Max)="0.037\" (0.95mm)", LatestRevisionDate=29-May-2009, LatestRevisionNote="IPC-7351 Footprint Added.", Mounting Type="Surface Mount", Number of Lines=1, PackageDescription="Chip Inductor", PackageReference=0402-A, Packaging="Cut Tape (CT)", Part Status=Active, Pricing 1="1=0.28, 10=0.215, 25=0.1776, 50=0.1532, 100=0.1378, 250=0.1164, 500=0.10416, 1000=0.08884 (CAD)", Published=8-Jun-2000, Publisher="Altium Limited", RoHS="RoHS Compliant", Size / Dimension="0.063\" L x 0.032\" W (1.60mm x 0.80mm)", Stock 1=303514, Supplier 1=Digi-Key
L3: Case/Package=1210, Case Code (Metric)=3225, Current Rating=4A, DC Resistance (DCR)=7mR, Inductance=110nH, Manufacturer="Wurth Electronics", Manufacturer Part Number=74479899111, Max Operating Temperature=125°C, Min Operating Temperature=-40°C, Self Resonant Frequency=300MHz, Supplier Part Number 1=732-7337-1-ND, Test Frequency=1MHz, Tolerance=20%, Case Code (Imperial)=1210, Code_IEC=1005, Code_JEITA=0402, ComponentLink1Description=https://katalog.we-online.de/pbs/datasheet/74479899111.pdf?src-supplier=Digi-Key, ComponentLink1URL=https://katalog.we-online.de/pbs/datasheet/74479899111.pdf?src-supplier=Digi-Key, Height - Seated (Max)=0.047inch, LatestRevisionDate=29-May-2009, LatestRevisionNote="IPC-7351 Footprint Added.", Length=0.126inch, Mount="Surface Mount", PackageDescription="Chip Inductor", PackageReference=0402-A, Packaging="Tape and Reel", Pricing 1="1 = 1.06000, 10 = 1.04200, 50 = 0.94100, 100 = 0.90700, 500 = 0.84000, 1000 = 0.77300 (USD)", Published=8-Jun-2000, Publisher="Altium Limited", RoHS=Yes, Saturation Current=4A, Shielding=Shielded, Stock 1=5231, Supplier 1=Digi-Key, Width=0.102inch
L4: Case/Package=Nonstandard, Current Rating=4.3A, DC Resistance (DCR)=48mR, Inductance=2.2uH, Manufacturer="Pulse Electronics", Manufacturer Part Number=PA4332.222NLT, Max Operating Temperature=125°C, Min Operating Temperature=-40°C, Saturation Current=6.1A, Self Resonant Frequency=25MHz, Supplier Part Number 1=553-3290-1-ND, Test Frequency=1MHz, Tolerance=20%, Code_IEC=1005, Code_JEITA=0402, ComponentLink1Description=http://products.pulseelex.com/files/product_files/P761.pdf?src-supplier=Digi-Key, ComponentLink1URL=http://products.pulseelex.com/files/product_files/P761.pdf?src-supplier=Digi-Key, Composition=Wirewound, Core Material=Ferrite, Height - Seated (Max)=0.079inch, LatestRevisionDate=29-May-2009, LatestRevisionNote="IPC-7351 Footprint Added.", Length=0.165inch, Mount="Surface Mount", PackageDescription="Chip Inductor", PackageReference=0402-A, Packaging="Tape and Reel", Pricing 1="1 = 0.64000, 10 = 0.56400, 100 = 0.40250, 500 = 0.33810, 1000 = 0.27370 (USD)", Published=8-Jun-2000, Publisher="Altium Limited", RoHS=Yes, Shielding=Shielded, Stock 1=9240, Supplier 1=Digi-Key, Width=0.165inch
Q1: library part CMP-1670-00009-1, "N-Channel Logic Level Enhancement Mode Field Effect Transistor, 220 mA, 50 V, -55 to 150 degC, 3-Pin SOT-23, RoHS, Tape and Reel", Capacitance="1.8E-11 f", Current - Continuous Drain (Id) @ 25°C="220mA (Ta)", Drain to Source Voltage (Vdss)=50V, Drive Voltage (Max Rds On,  Min Rds On)="4.5V, 10V", Frequency="12 MHz", Frequency Tolerance=30ppm, Input Capacitance (Ciss) (Max) @ Vds="27pF @ 25V", Load Capacitance="18 pF", Manufacturer="Fairchild/ON Semiconductor", Max Operating Temperature=70degC, Min Operating Temperature=-20degC, Operating Temperature="-55°C ~ 150°C (TJ)", Package / Case="TO-236-3, SC-59, SOT-23-3", Package Quantity=1, Power Dissipation (Max)="360mW (Ta)", Resistance="100 Ohm", Supplier Device Package=SOT-23-3, Supplier Part Number 1=BSS138CT-ND, Category="Discrete Semiconductor Products", ComponentLink1Description="Manufacturer URL", ComponentLink1URL=https://www.fairchildsemi.com/, ComponentLink2Description=Datasheet, ComponentLink2URL=https://www.fairchildsemi.com/datasheets/BS/BSS138.pdf, ComponentLink3Description="Package Specification", ComponentLink3URL=http://www.fairchildsemi.com/dwg/MA/MA03D.pdf, DatasheetVersion="Rev. C, 10/2005", ESR="40 Ohm", FET Feature=-, FET Type=N-Channel, Gate Charge (Qg) (Max) @ Vgs="2.4nC @ 10V", Height="0.041 inch", Length="0.197 inch", Manufacturer Part Number=BSS138, Mount="Surface Mount", Mounting Type="Surface Mount", PackageDescription="3-Pin Small Outline Transistor, Body 2.92 x 1.325 mm, Pitch 0.95 mm", PackageReference=SOT23-3, Packaging="Tape and Reel", Part Status=Active, Pins=4, Pricing 1="1=0.31, 10=0.252, 100=0.1339, 500=0.0881, 1000=0.05991 (CAD)", Rds On (Max) @ Id, Vgs="3.5 Ohm @ 220mA, 10V", REACH SVHC=Unknown, RoHS="RoHS Compliant", RoHSCompliant=True, Stock 1=450063, Supplier 1=Digi-Key, Technology="MOSFET (Metal Oxide)", Tolerance=30ppm, Vgs (Max)=±20V, Vgs(th) (Max) @ Id="1.5V @ 1mA", Width="0.126 inch"
R1 R7: "Resistor", Case/Package=0603, Case Code (Metric)=1608, Manufacturer=Yageo, Manufacturer Part Number=RC0603FR-07130KL, Max Operating Temperature=155°C, Max Power Dissipation=100mW, Min Operating Temperature=-55°C, Package Quantity=1, Resistance=130kR, Supplier Part Number 1=311-130KHRCT-ND, Temperature Coefficient=100ppm/°C, Tolerance=1%, Voltage Rating=75V, Voltage Rating (DC)=50V, Case Code (Imperial)=0603, ComponentLink1Description=https://datasheet.ciiva.com/2455/pyu-r-int-thick-7-2455192.pdf?src-supplier=Digi-Key, ComponentLink1URL=https://datasheet.ciiva.com/2455/pyu-r-int-thick-7-2455192.pdf?src-supplier=Digi-Key, ComponentLink2Description=https://datasheet.ciiva.com/2455/pyu-r-int-thick-7-2455191.pdf?src-supplier=Digi-Key, ComponentLink2URL=https://datasheet.ciiva.com/2455/pyu-r-int-thick-7-2455191.pdf?src-supplier=Digi-Key, ComponentLink3Description=https://datasheet.ciiva.com/2455/pyu-r-int-thick-7-2455193.pdf?src-supplier=Digi-Key, ComponentLink3URL=https://datasheet.ciiva.com/2455/pyu-r-int-thick-7-2455193.pdf?src-supplier=Digi-Key, Composition="Thick Film", Depth=0.8mm, Features="Moisture Resistant", Height=0.022inch, LatestRevisionDate=29-May-2009, LatestRevisionNote="IPC-7351 Footprint Added.", Lead Free="Lead Free", Length=1.6mm, Military Standard=Not, Number of Terminations=2, PackageDescription="Chip Resistor", PackageReference=J1-0603, Packaging="Tape and Reel", Power Rating=100mW, Pricing 1="1 = 0.10000, 10 = 0.02400, 100 = 0.00970, 1000 = 0.00437, 2500 = 0.00379 (USD)", Published=8-Jun-2000, Publisher="Altium Limited", RoHS=Yes, Stock 1=773087, Supplier 1=Digi-Key, Termination=SMD/SMT, Weight=7.1E-05oz, Width=0.8mm
R2 R5: "Resistor", Case/Package=0603, Case Code (Metric)=1608, Manufacturer="Stackpole Electronics", Manufacturer Part Number=RMCF0603FT100R, Max Operating Temperature=155°C, Max Power Dissipation=100mW, Min Operating Temperature=-55°C, Resistance=100R, Supplier Part Number 1=RMCF0603FT100RCT-ND, Temperature Coefficient=100ppm/°C, Tolerance=1%, Case Code (Imperial)=0603, ComponentLink1Description=https://datasheet.ciiva.com/15215/getdatasheetpartid-360413-15215981.pdf?src-supplier=Verical, ComponentLink1URL=https://datasheet.ciiva.com/15215/getdatasheetpartid-360413-15215981.pdf?src-supplier=Verical, Composition="Thick Film", Contact Plating=Tin, Depth=0.8mm, Features="Automotive AEC-Q200", Height=0.022inch, LatestRevisionDate=29-May-2009, LatestRevisionNote="IPC-7351 Footprint Added.", Lead Free="Lead Free", Length=1.55mm, Military Standard=Not, Mount="Surface Mount", Number of Terminations=2, PackageDescription="Chip Resistor", PackageReference=J1-0603, Packaging="Tape and Reel", Power Rating=100mW, Pricing 1="1 = 0.10000, 10 = 0.01700, 100 = 0.00680, 1000 = 0.00306, 2500 = 0.00266 (USD)", Published=8-Jun-2000, Publisher="Altium Limited", Radiation Hardening=No, RoHS=Yes, Stock 1=2775736, Supplier 1=Digi-Key, Width=0.031inch
R3: "Resistor", Case/Package=0603, Case Code (Metric)=1608, Manufacturer=Yageo, Manufacturer Part Number=RC0603FR-07160RL, Max Operating Temperature=155°C, Max Power Dissipation=100mW, Min Operating Temperature=-55°C, Package Quantity=1, Resistance=160R, Supplier Part Number 1=311-160HRCT-ND, Temperature Coefficient=100ppm/°C, Tolerance=1%, Voltage Rating=75V, Voltage Rating (DC)=50V, Case Code (Imperial)=0603, ComponentLink1Description=https://datasheet.ciiva.com/11808/0900766b80f96399-11808753.pdf?src-supplier=RSComponents, ComponentLink1URL=https://datasheet.ciiva.com/11808/0900766b80f96399-11808753.pdf?src-supplier=RSComponents, ComponentLink2Description=https://datasheet.ciiva.com/2454/pyu-r-int-thick-7-2454168.pdf?src-supplier=Digi-Key, ComponentLink2URL=https://datasheet.ciiva.com/2454/pyu-r-int-thick-7-2454168.pdf?src-supplier=Digi-Key, ComponentLink3Description=https://datasheet.ciiva.com/2454/pyu-r-int-thick-7-2454169.pdf?src-supplier=Digi-Key, ComponentLink3URL=https://datasheet.ciiva.com/2454/pyu-r-int-thick-7-2454169.pdf?src-supplier=Digi-Key, ComponentLink4Description=https://datasheet.ciiva.com/2454/pyu-r-int-thick-7-2454170.pdf?src-supplier=Digi-Key, ComponentLink4URL=https://datasheet.ciiva.com/2454/pyu-r-int-thick-7-2454170.pdf?src-supplier=Digi-Key, Composition="Thick Film", Depth=0.8mm, Features="Moisture Resistant", Height=0.45mm, LatestRevisionDate=29-May-2009, LatestRevisionNote="IPC-7351 Footprint Added.", Lead Free="Lead Free", Length=1.6mm, Military Standard=Not, Mount="Surface Mount", Number of Terminations=2, PackageDescription="Chip Resistor", PackageReference=J1-0603, Packaging="Tape and Reel", Power Rating=100mW, Pricing 1="1 = 0.10000, 10 = 0.02400, 100 = 0.00970, 1000 = 0.00437, 2500 = 0.00379 (USD)", Published=8-Jun-2000, Publisher="Altium Limited", RoHS=Yes, Stock 1=508932, Supplier 1=Digi-Key, Termination=SMD/SMT, Weight=7.1E-05oz, Width=0.031inch